# EAGLE board clickclack-mk-1.1-b (EAGLE 6.5.0)
VERSION: v1.0
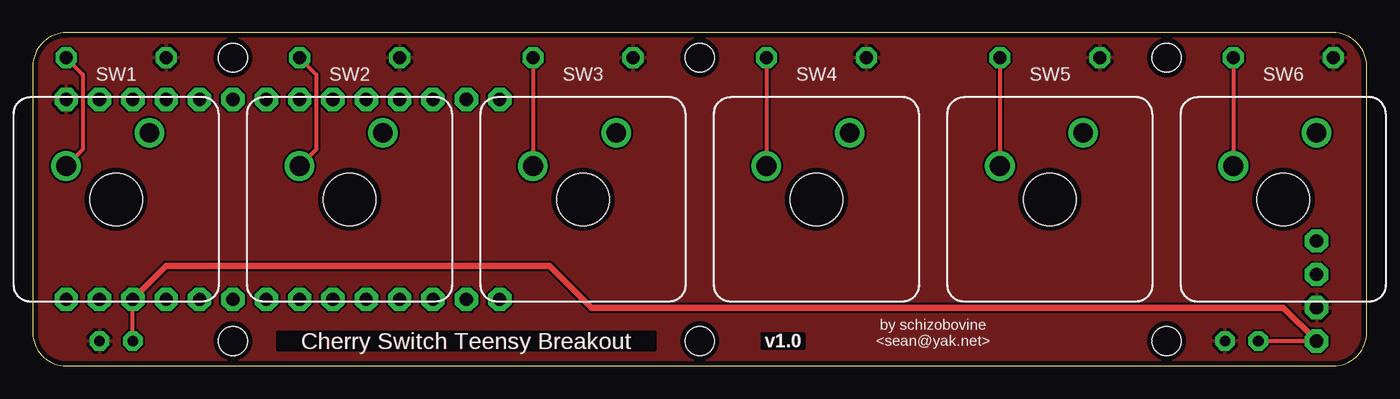
[diagram p0: board, top side]
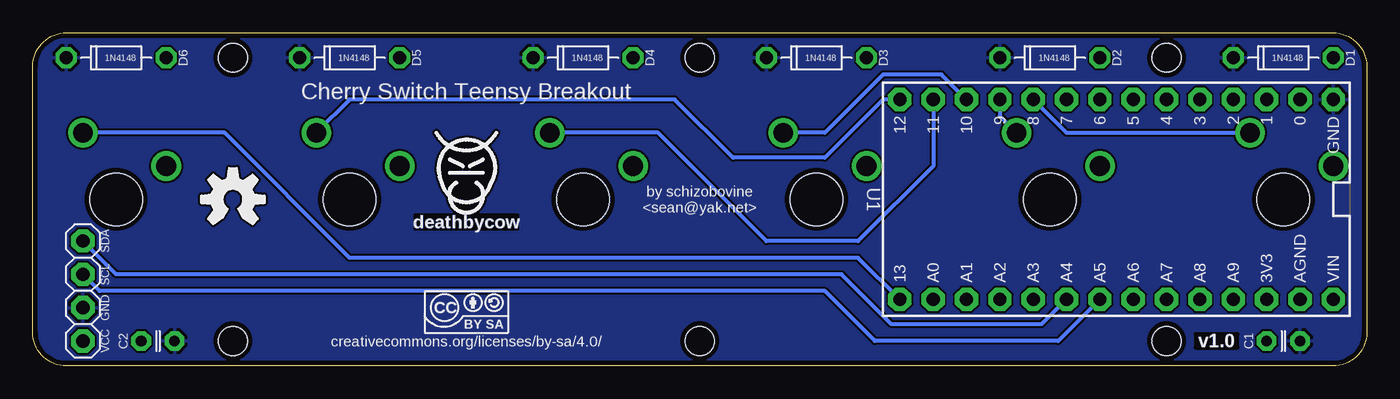
[diagram p1: board, bottom side, seen from below]

Size 101.6 x 25.4 mm. Coordinates in mm from the lower left corner, seen from the top.
Outline: 2.54,0 99.06,0 arc90 101.6,2.54 101.6,22.86 arc90 99.06,25.4 2.54,25.4 arc90 0,22.86 0,2.54 arc90 2.54,0
Copper layers (1*16): Top 0.0356mm / dielectric 1.5011mm / Bottom 0.0356mm
Design rules "LaenPCBOrder_2": minimum track width 6mil, minimum drill 13mil, track to track 6mil, track to pad 6mil, pad to pad 6mil, via to via 6mil, smd to smd 6mil, copper to edge 15mil, drill to drill 6mil, minimum pad ring 7mil, minimum via ring 7mil, stop-mask expansion 3mil, vias tented up to drill 20mil, thermal gap 10mil
Holes 2.2 mm at 86.36,1.91 15.24,23.5 15.24,1.91 86.36,23.5 50.8,23.5 50.8,1.91

## Footprints (pad centres in the part's own frame; a part is rotated, then mirrored left to right if it is on the bottom)
C025-024X044 = drill 0.813 pad 1.5 octagon: 1 -1.27,0; 2 1.27,0
DIODE-7.62MM = drill 1 pad 1.6 octagon: A -3.81,0; K 3.81,0
1X01 = drill 1.016 pad 1.778 octagon: 1 0,0
CHERRY-MX-NONUBS = drill 1.5: 1 -3.81,2.54; 2 2.54,5.08 | hole 4: 0,0
TEENSY_3.0_BASIC_ALT2 = drill 1 pad 1.778 octagon: 0 -7.62,13.97; 1 -7.62,11.43; 2 -7.62,8.89; 3 -7.62,6.35; 3.3V 7.62,11.43; 4 -7.62,3.81; 5 -7.62,1.27; 6 -7.62,-1.27; 7 -7.62,-3.81; 8 -7.62,-6.35; 9 -7.62,-8.89; 10 -7.62,-11.43; 11 -7.62,-13.97; 12 -7.62,-16.51; 13 7.62,-16.51; 14/A0 7.62,-13.97; 15/A1 7.62,-11.43; 16/A2 7.62,-8.89; 17/A3 7.62,-6.35; 18/A4 7.62,-3.81; 19/A5 7.62,-1.27; 20/A6 7.62,1.27; 21/A7 7.62,3.81; 22/A8 7.62,6.35; 23/A9 7.62,8.89; AGND 7.62,13.97; GND -7.62,16.51; VIN 7.62,16.51

## Placement (x,y rotation side)
C1  100n  [C025-024X044]  6.35,1.91 0 bottom
C2  100n  [C025-024X044]  92.08,1.91 0 bottom
D1  1N4148  [DIODE-7.62MM]  6.35,23.5 180 bottom
D2  1N4148  [DIODE-7.62MM]  24.13,23.5 180 bottom
D3  1N4148  [DIODE-7.62MM]  41.91,23.5 180 bottom
D4  1N4148  [DIODE-7.62MM]  59.69,23.5 180 bottom
D5  1N4148  [DIODE-7.62MM]  77.47,23.5 180 bottom
D6  1N4148  [DIODE-7.62MM]  95.25,23.5 180 bottom
FRAME1  FRAME-LETTERNO_PACKAGE  [DUMMY]  0,0 0 top
GND  M01PTH  [1X01]  97.79,4.45 270 bottom
SCL  M01PTH  [1X01]  97.79,6.99 270 bottom
SDA  M01PTH  [1X01]  97.79,9.53 270 bottom
SW1  CHERRY-MXNONUBS  [CHERRY-MX-NONUBS]  6.35,12.7 0 top
SW2  CHERRY-MXNONUBS  [CHERRY-MX-NONUBS]  24.13,12.7 0 top
SW3  CHERRY-MXNONUBS  [CHERRY-MX-NONUBS]  41.91,12.7 0 top
SW4  CHERRY-MXNONUBS  [CHERRY-MX-NONUBS]  59.69,12.7 0 top
SW5  CHERRY-MXNONUBS  [CHERRY-MX-NONUBS]  77.47,12.7 0 top
SW6  CHERRY-MXNONUBS  [CHERRY-MX-NONUBS]  95.25,12.7 0 top
U1  TEENSY_3.0_BASIC_ALTDIP  [TEENSY_3.0_BASIC_ALT2]  19.05,12.7 270 bottom
U$1  [CC-BY-SA-4.0-URL-BOTTOM]  68.58,4.45 0 bottom
U$3  [COW_SMALL_METAL]  68.58,15.24 0 bottom
U$4  [OSHWLOGO_5MM_METAL]  86.36,12.7 0 bottom
VCC  M01PTH  [1X01]  97.79,1.91 270 bottom

## Library data of the parts
C1 C2 D1-D6 GND SCL SDA SW1-SW6 U1 U$1 U$3 U$4 VCC = A_butts
FRAME1 = A_butts; DESIGNER: Nobody; VERSION: v01

## Nets
AGND: U1.AGND
GND: C1.2 C2.2 D1.K D2.K D3.K D4.K D5.K D6.K GND.1 U1.GND
KEY1: SW1.2 U1.8
KEY2: SW2.2 U1.9
KEY3: SW3.2 U1.10
KEY4: SW4.2 U1.11
KEY5: SW5.2 U1.12
KEY6: SW6.2 U1.13
N$1: D1.A SW1.1
N$2: D2.A SW2.1
N$3: D3.A SW3.1
N$4: D4.A SW4.1
N$5: D5.A SW5.1
N$6: D6.A SW6.1
SCL: SCL.1 U1.19/A5
SDA: SDA.1 U1.18/A4
VCC: C1.1 C2.1 U1.3.3V VCC.1
VIN: U1.VIN

## Tracks (layer width: path | path; a pad name or v marks a point on that pad's centre or on a via)
GND
  pour Bottom: 2.54,25.4 99.06,25.4 arc-90 101.6,22.86 101.6,2.54 arc-90 99.06,0 2.54,0 arc-90 0,2.54 0,22.86 arc-90
  pour Top: 0,0 0,25.4 101.6,25.4 101.6,0
KEY1
  Bottom 0.305: U1.8 22.86,17.78 SW1.2
KEY2
  Bottom 0.305: U1.9 27.94,19.05 SW2.2
KEY3
  Bottom 0.305: U1.10 32.38,22.23 36.83,22.23 41.27,17.78 SW3.2
KEY4
  Bottom 0.305: U1.11 33.02,15.24 38.73,9.53 45.72,9.53 53.98,17.78 SW4.2
KEY5
  Bottom 0.305: U1.12 36.83,20.32 41.27,15.88 48.26,15.88 52.7,20.32 77.47,20.32 SW5.2
KEY6
  Bottom 0.305: U1.13 38.73,8.26 77.47,8.26 87,17.78 SW6.2
N$1
  Top 0.305: D1.A 3.81,22.23 3.81,16.51 SW1.1
N$2
  Top 0.305: D2.A 21.59,22.23 21.59,16.51 SW2.1
N$3
  Top 0.305: D3.A SW3.1
N$4
  Top 0.305: D4.A SW4.1
N$5
  Top 0.305: D5.A SW5.1
N$6
  Top 0.305: D6.A SW6.1
SCL
  Bottom 0.305: U1.19/A5 23.5,1.91 37.47,1.91 41.27,5.71 96.52,5.71 SCL.1
SDA
  Bottom 0.305: U1.18/A4 24.77,3.17 36.2,3.17 40.01,6.99 95.25,6.99 SDA.1
VCC
  Top 0.305: C2.1 VCC.1 | C1.1 U1.3.3V
  Top 0.508: U1.3.3V 10.16,7.62 39.37,7.62 42.55,4.45 95.25,4.45 VCC.1

## Text on the board
Top: Cherry Switch Teensy Breakout
tPlace: by schizobovine / <sean@yak.net> | Cherry Switch Teensy Breakout
bPlace: Cherry Switch Teensy Breakout | by schizobovine / <sean@yak.net>